# Altium PCB slpMon.PcbDoc
Units mil, origin at the board's own origin, x right, y up, seen from the top; angles counter-clockwise.
Board outline 984.25 x 669.29 mil, 2 copper layers (Top Layer, Bottom Layer), stack 65.792 mil thick; 26 components, 18 nets, 92 pads, 15 vias.
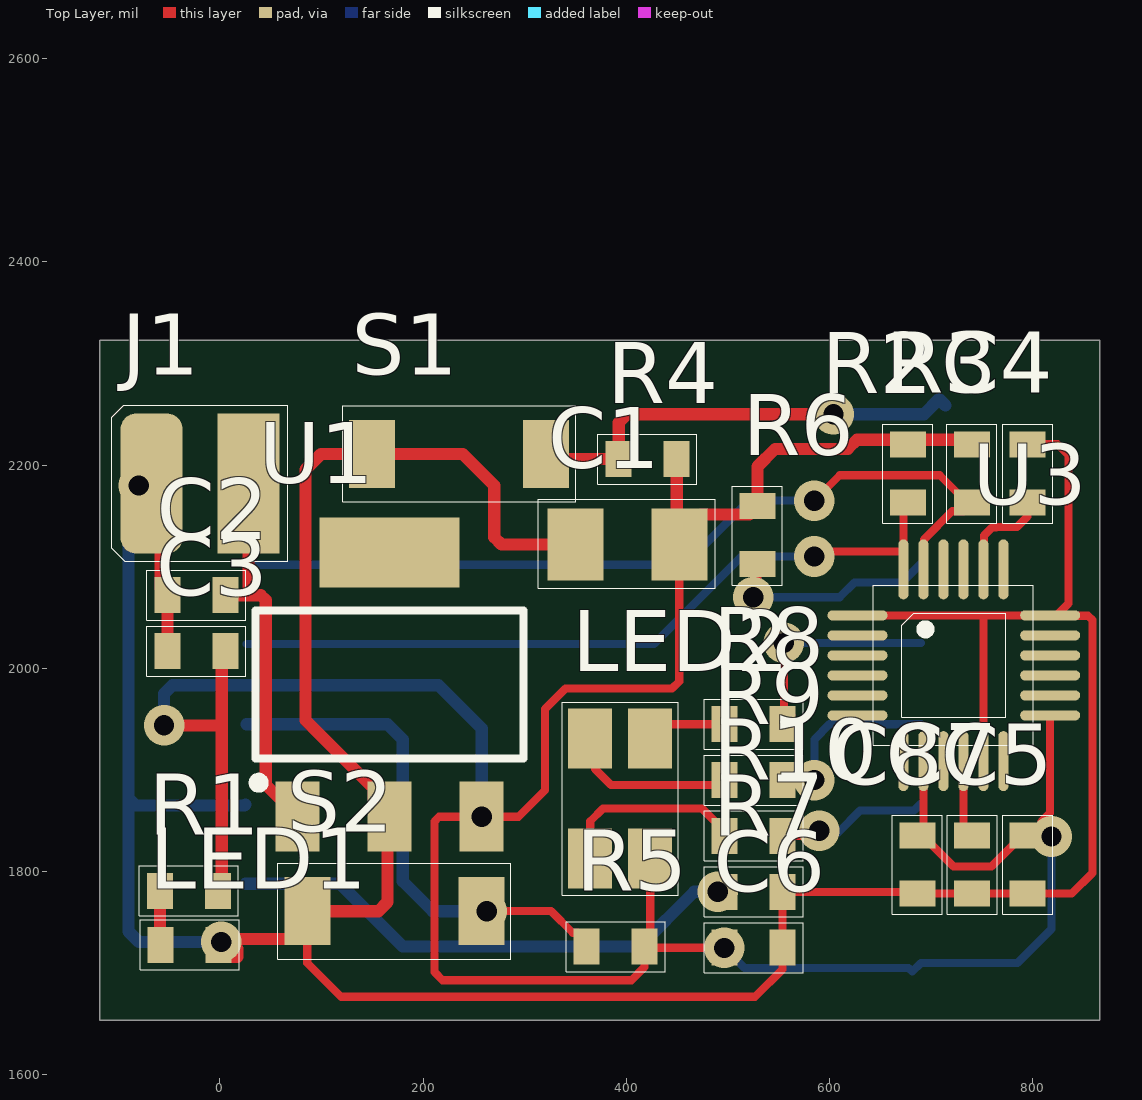
[diagram p0: Top Layer view]
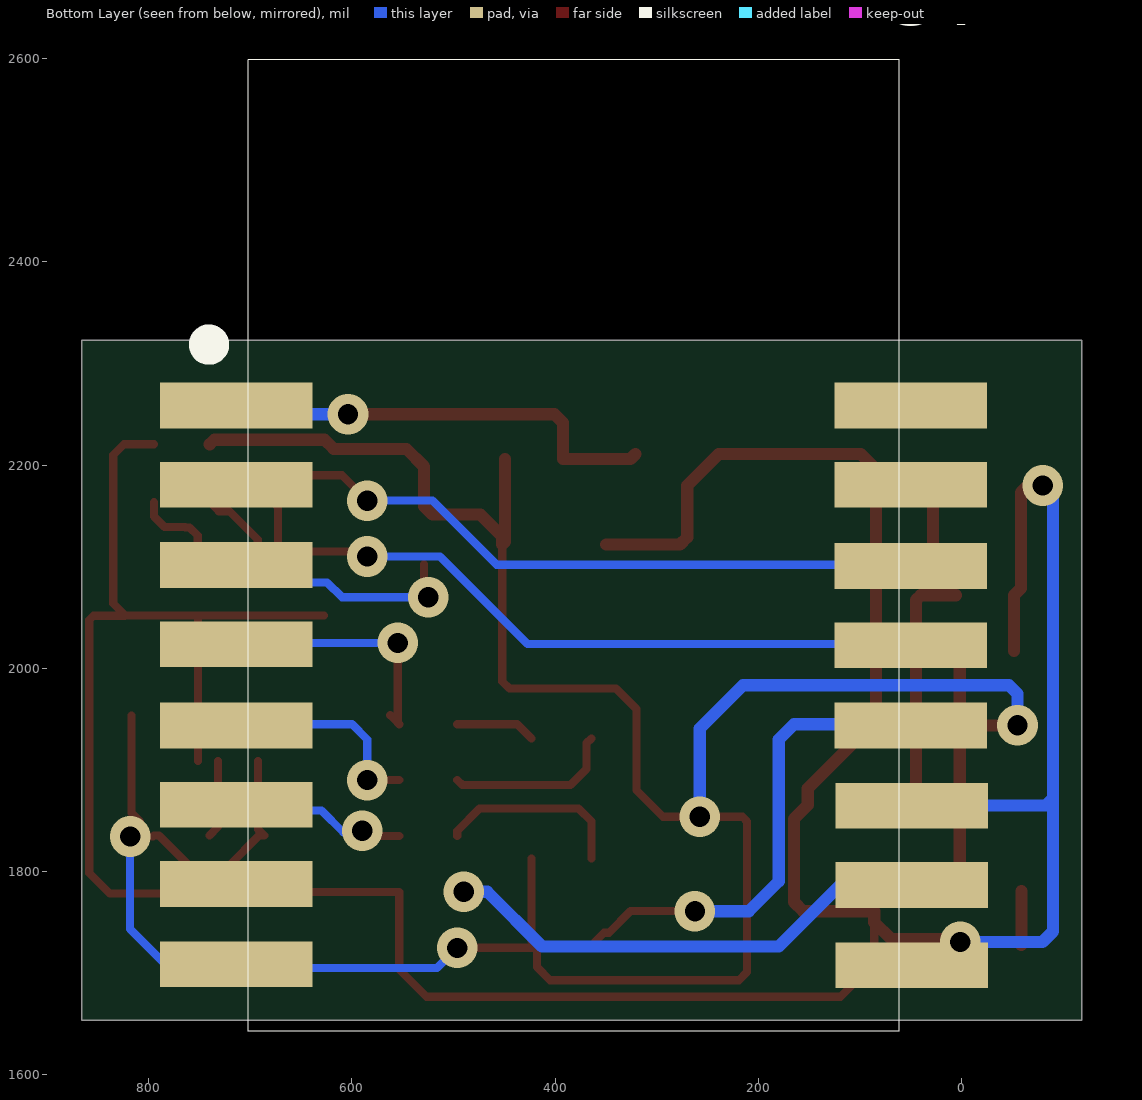
[diagram p1: Bottom Layer view, seen from below]

## Layer stack, top to bottom
Top Solder: solder mask 0.4, Solder Resist, Dk 3.5
Top Layer: signal copper 1.4
Dielectric 1: dielectric 62.9921, FR-4, Dk 4.8
Bottom Layer: signal copper 1.4
Bottom Solder: solder mask 0.4, Solder Resist, Dk 3.5

## Board outline
-118.11,2322.83 866.14,2322.83 866.14,1653.54 -118.11,1653.54

## Design rules (kind name [scope] priority, off if disabled: settings)
Clearance [All] p1: gap=8 ignorepadtopadclearanceinfootprint=TRUE except(0: Arc-Text Track-Text SMDPad-Text THPad-Text Via-Text Fill-Text Poly-Text Region-Text Text-Text)
ComponentClearance [All] p1: gap=0 collisioncheckmode=3 verticalgap=0 showdistances=FALSE
HoleSize [IsPad] p1: absolutevalues=TRUE maxlimit=100 minlimit=30 maxpercent=80.000 minpercent=20.000
MinimumSolderMaskSliver [All] p1: minsoldermaskwidth=0
PolygonConnect [All] p1: connectstyle=Relief reliefconductorwidth=10 reliefentries=4 polygonreliefangle="90 Angle" airgapwidth=10
RoutingVias [All] p1: holewidth=20 width=40 viastyle="Through Hole" minholewidth=20 minwidth=40 maxholewidth=100 maxwidth=400
SilkToSilkClearance [All] p1: silktosilkclearance=0
SilkToSolderMaskClearance [IsPad] p1: minsilkscreentomaskgap=0 clearancetoexposedcopper=TRUE
SolderMaskExpansion [All] p1: expansion=0.4
Width [All] p1: maxlimit=200 minlimit=8 preferedwidth=12 minimp=50.000000 maximp=50.000000 favimp=50.000000
25 further rules are at their usual default settings.

## Components (designator, comment, footprint, x,y, rotation, side; value= is the part's Value field where it differs from the comment)
C1 "C_POL" SMD_TANTAL_1206 399.94,2122.96 r180 top
C2 "C" SMD_RC_0603 -24.06,2070.96 r0 top
C3 "C" SMD_RC_0603 -24.06,2015.96 r0 top
C4 "223" SMD_RC_0603 795.94,2190.96 r90 top
C5 "104" SMD_RC_0603 795.94,1805.96 r90 top
C6 "C" SMD_RC_0603 525.94,1725.96 r180 top
C7 "104" SMD_RC_0603 741.33,1805.94 r90 top
C8 "103" SMD_RC_0603 687.41,1805.94 r90 top
J1 "PAD_2512x2" PAD_2512X2 -19.06,2180.96 r180 top
LED1 "LED" SMD_LED_0603 -31.15,1726.92 r0 top
LED2 "LED_RGB_3528" SMD_LED_RGB_3528 395.94,1870.96 r270 top
R1 "1K" SMD_RC_0603 -31.5,1779.98 r0 top
R2 "1K" SMD_RC_0603 677.97,2190.56 r90 top
R3 "1K" SMD_RC_0603 740.94,2190.96 r90 top
R4 "1K" SMD_RC_0603 420,2205 r0 top
R5 "1K" SMD_RC_0603 390.46,1726.95 r180 top
R6 "1K" SMD_RC_0603 530,2130 r90 top
R7 "1K" SMD_RC_0603 525.94,1780.96 r180 top
R8 "1K" SMD_RC_0603 525.94,1945.96 r180 top
R9 "1K" SMD_RC_0603 525.94,1890.96 r180 top
R10 "1K" SMD_RC_0603 525.94,1835.96 r180 top
S1 "SW" SW_SMD_1 235.94,2210.96 r0 top
S2 "SW" SW_SMD_1 170.94,1760.96 r180 top
U1 "LDO_1117" SOT-223 175.94,1975.96 r0 top
U3 "MPU6050" QUAD_24_EXTENDED 720.94,2000.96 r0 top
U? "ESP8266_12E" ESP8266_ESP12E_SIMPLER 750.57,2210.35 r180 bottom

## Footprints (in the part's own frame and the unit in brackets; to place one, negate y for a bottom-side part, rotate by r counter-clockwise, add the part's x,y. Pads: shape width x height; smd on the part's side, far side on the other; paste and mask are expansions set on the pad)
ESP8266_ESP12E_SIMPLER [mil]
  rect 150x45 smd: 1(36.47,48.38) 2(36.47,-29.62) 3(36.47,-108.62) 4(36.47,-186.62) 5(36.47,-266.62) 6(36.47,-344.62) 7(36.47,-422.62) 8(36.47,-501.62) 15(701.35,-502.63) 16(701.35,-423.63) 17(701.35,-345.63) 18(700.35,-266.63) 19(700.35,-187.63) 20(700.35,-109.63) 21(700.35,-29.63) 22(700.35,48.37)
  silkscreen extent 0,-568 689,389, body extent 53,-561 683,384, height 86
PAD_2512X2 [mm]
  rect 1.55x3.5 smd: 1(-1.2,-0.025)
  rrect50% 1.55x3.5 smd: 2(1.225,-0.025)
  silkscreen extent -2.17,-1.97 2.22,1.92
QUAD_24_EXTENDED [mm]
  oval 1.5x0.254 smd: 1(-2.375,1.3) 2(-2.375,0.8) 3(-2.375,0.3) 4(-2.375,-0.2) 5(-2.375,-0.7) 6(-2.375,-1.2) 13(2.443,-1.2) 14(2.443,-0.7) 15(2.443,-0.2) 16(2.443,0.3) 17(2.443,0.8) 18(2.443,1.3)
  oval 0.254x1.5 smd: 7(-1.225,-2.345) 8(-0.725,-2.345) 9(-0.225,-2.345) 10(0.275,-2.345) 11(0.775,-2.345) 12(1.275,-2.345) 19(1.275,2.45) 20(0.775,2.45) 21(0.275,2.45) 22(-0.225,2.45) 23(-0.725,2.45) 24(-1.225,2.45)
  silkscreen extent -1.98,-1.95 2.02,2.05, body extent -1.97,-1.95 2.02,2.05, height 0.8
SMD_LED_0603 [mm]
  rect 0.65x0.9 smd: 1(-0.7,0.025) 2(0.75,0.025)
  silkscreen extent -1.2,-0.6 1.28,0.65
SMD_LED_RGB_3528 [mm]
  rect 1.5x1.1 smd: 1(-1.525,0.7) 2(1.475,0.7) 3(1.475,-0.8) 4(-1.525,-0.8)
  silkscreen extent -2.42,-1.5 2.4,1.4
SMD_RC_0603 [mm]
  rect 0.65x0.9 smd: 1(-0.7,0.025) 2(0.75,0.025)
  silkscreen extent -1.22,-0.6 1.26,0.65
SMD_TANTAL_1206 [mm]
  rect 1.4x1.8 smd: 1(-1.325,0.025) 2(1.275,0.025)
  silkscreen extent -2.22,-1.1 2.2,1.12
SOT-223 [mm]
  rect 1.1x1.75 smd: 1(-2.525,-3.1) 2(-0.225,-3.1) 3(2.075,-3.1)
  rect 3.5x1.75 smd: 4(-0.225,3.5)
  silkscreen extent -3.62,-2.37 3.13,2.05, body extent -3.57,-3.5 3.13,3.7, height 1.85
SW_SMD_1 [mm]
  rect 1.15x1.7 smd: 1(-2.191,0) 2(2.159,0)
  silkscreen extent -2.93,-1.2 2.9,1.2

## Part data
C4 C5 C7 C8: library part C
R1 R2 R3 R4 R5 R6 R7 R8 R9 R10: library part R
U?: library part ESP8266_ESP12E_SIMPLER
LED2: ComponentLink1Description="LED 3528 - TGIC", ComponentLink1URL=https://thegioiic.com/products/led-rgb-3528
S1 S2: ComponentLink1Description=TheGioiIC, ComponentLink1URL=https://thegioiic.com/products/nut-nhan-3x4-cao-2-5mm-2pin-smd

## Via types
v1: diameter 40, hole 20, Top Layer to Bottom Layer, 15 vias

## Nets (pads, with @x,y where several pads share a name; then routed paths per layer and width w, separated by ;. In a path a pad name is that pad's centre, name@x,y a point inside that pad or via, vN(x,y) a via of type N, cw(c..) or ccw(c..) an arc to the next point about the centre after c; other vN are vias at no path point)
3V3: C1.1 C3.2 C5.2 C6.2 C8.2 LED2.2 R1.2 R2.2 R3.2 R4.2 R5.1 R6.2 U1.3 U3.8 U3.13 U?.8 | length 3005.8
  Top Layer w8: LED2.2 423.5,1731.44 R5.1 ; C1.1 452.1,1987.1 445,1980 340,1980 320,1960 320,1880 293.92,1853.92 v1(257.63,1853.92) 215.77,1853.92 211.08,1849.23 211.08,1701.08 219.14,1693.02 405.21,1693.02 418.02,1705.84 R5.1 ; v1(496.41,1724.8) C6.2 419.01,1724.98 R5.1 ; U3.8 692.39,1841.44 C8.2 691.34,1835.46 721.81,1805 759.54,1805 790.03,1835.49 C5.2 795.96,1834.49 v1(818.38,1834.49) ; v1@808.67,1849.21 817.12,1857.66 U3.13
  Top Layer w12: v1(-55,1943.81) 1.74,1943.81 ; R1.2 1.74,1784.69 1.74,1943.81 ; C3.2 1.74,2013.23 1.74,1943.81 ; R4.2 449.53,2124.56 C1.1 452.1,2129.85 473.66,2151.41 520.9,2151.41 R6.2 529.02,2198.52 546.49,2216 618.01,2216 627.01,2225 735.44,2225 R3.2
  Bottom Layer w8: v1(496.41,1724.8) 516.21,1705 677.82,1705 681.41,1701.41 690,1710 785,1710 818.38,1743.38 v1(818.38,1834.49)
  Bottom Layer w12: v1(-55,1943.81) -55,1975 -46.72,1983.28 215.12,1983.28 257.63,1940.77 v1(257.63,1853.92)
B: R10.1 U?.6 | length 151.7
  Top Layer w8: R10.1 584.98,1834.98 v1(590,1840)
  Bottom Layer w8: v1(590,1840) 590,1838.66 608.66,1838.66 630,1860 683,1860 U?.6@690,1867
G: R9.1 U?.5 | length 182.7
  Top Layer w8: R9.1 v1(585,1890)
  Bottom Layer w8: v1(585,1890) 585,1930 600,1945 U?.5@690,1945
GND: C1.2 C2.1 C3.1 C4.2 C5.1 C6.1 C7.1 C8.1 J1.2 LED1.2 R7.1 S1.1 S2.2 U1.2 U3.1 U3.11 U3.18 U?.15 U?.17 | length 3639.3
  Top Layer w8: S2.2@85.94,1750.14 85.94,1710.12 119.32,1676.73 526.73,1676.73 553.5,1703.5 C6.1 R7.1 684.82,1779.98 C8.1 C7.1 ; U3.1 751.82,2052.15 ; C7.1@740.37,1778.41 C5.1 838.41,1778.41 858.65,1798.65 858.65,2047.46 854.34,2051.76 823.74,2051.76 U3.18@823.35,2052.15 ; U3.11 751.45,2051.78 751.82,2052.15 ; C4.2 824.51,2220.49 835,2210 835,2063.79 U3.18@823.35,2052.15 ; 751.82,2052.15 U3.18 U3.18@823.35,2052.15
  Top Layer w12: v1(-80,2180) -69.24,2180 J1.2 -58.42,2173.07 -58.42,2078.74 C2.1 C3.1 ; C1.2 277.03,2121.98 270,2129.01 270,2180 239.04,2210.96 S1.1 99.34,2210.96 84.18,2195.8 84.18,1948.9 151.43,1881.66 151.43,1865.41 165,1851.84 165,1770 155.96,1760.96 S2.2 85.94,1750.14 69.3,1733.5 3.97,1733.5 v1(1.17,1730.7) ; v1(1.17,1730.7) LED1.2 -1.62,1722.99 5.17,1716.19 17.17,1716.19 17.17,1724.07 10.54,1730.7 v1(1.17,1730.7)
  Bottom Layer w12: v1(-80,2180) -90,2170 -90,1871.92 ; v1(1.17,1730.7) -79.74,1730.7 -90,1740.96 -90,1871.92 ; U?.17@25.12,1865.99 24.2,1865.06 -83.15,1865.06 -90,1871.92
NetC2_2: C2.2 J1.1 U1.1 | length 379
  Top Layer w12: C2.2 25.38,2071.95 ; J1.1 28.18,2074.75 25.38,2071.95 ; U1.1 45,1885.45 45,2067.14 40.19,2071.95 25.38,2071.95
NetC4_1: C4.1 U3.20 | length 98.3
  Top Layer w8: U3.20 751.83,2097.8 751.83,2130.55 759.89,2138.61 763.75,2138.61 764.09,2138.95 784.63,2138.95 794.95,2149.27 C4.1
NetC7_2: C7.2 U3.10 | length 76.7
  Top Layer w8: U3.10 731.76,1844.04 C7.2
NetLED1_1: LED1.1 R1.1 | length 53.2
  Top Layer w12: R1.1 -58.89,1780.79 -58.89,1728.08 LED1.1
NetLED2_1: LED2.1 R8.2 | length 78.7
  Top Layer w8: LED2.1 437.49,1945 R8.2
NetLED2_3: LED2.3 R10.2 | length 187.7
  Top Layer w8: LED2.3 364.44,1849.44 376.9,1861.9 474.41,1861.9 496.41,1839.9 R10.2
NetLED2_4: LED2.4 R9.2 | length 168
  Top Layer w8: LED2.4 369.13,1926.32 369.13,1900.87 385,1885 491.43,1885 R9.2
NetR4_1: R4.1 S1.2 U?.1 | length 443.2
  Top Layer w12: S1.2 325.92,2205.98 R4.1 392.44,2241.7 400.74,2250 v1(603.93,2250)
  Bottom Layer w12: v1(603.93,2250) 692.83,2250 707.83,2265 U?.1
NetR5_2: R5.2 S2.1 U?.18 | length 510.2
  Top Layer w8: v1(262.48,1760.96) 325.94,1760.96 347.22,1739.68 352.14,1739.68 360.94,1730.89 R5.2
  Bottom Layer w12: U?.18@26.12,1944.99 165.01,1944.99 180,1930 180,1790.43 209.46,1760.96 v1(262.48,1760.96)
NetR6_1: R6.1 U?.3 | length 212.8
  Top Layer w8: v1(525,2070) 529.02,2074.02 R6.1
  Bottom Layer w8: v1(525,2070) 610,2070 624.5,2084.5 671.5,2084.5 U?.3@690,2103
NetR7_2: R7.2 U?.16 | length 512.8
  Bottom Layer w12: U?.16@25.12,1787.99 118.12,1787.99 180,1726.11 412.9,1726.11 466.79,1780 v1(490,1780)
R: R8.1 U?.4 | length 228.1
  Top Layer w8: v1(555,2025) 555,1946.48 R8.1 R8.1@562.29,1953.78
  Bottom Layer w8: v1(555,2025) U?.4@690,2025
SCL: R3.1 U3.23 U?.20 | length 853.1
  Top Layer w8: v1(585,2165) 610,2190 708.44,2190 730.08,2168.36 735,2168.36 R3.1 731.16,2154.61 720.7,2154.61 692.78,2126.69 692.78,2097.8 U3.23
  Bottom Layer w8: U?.20@26.12,2101.99 457.69,2101.99 520.7,2165 v1(585,2165)
SDA: R2.1 U3.24 U?.19 | length 752
  Top Layer w8: v1(585,2110) 590,2115 671.78,2115 U3.24@672.71,2114.08 ; U3.24 U3.24@672.71,2114.08 ; R2.1 672.71,2158.72 U3.24@672.71,2114.08
  Bottom Layer w8: U?.19@26.12,2023.99 427.28,2023.99 513.29,2110 v1(585,2110)
pads on no net: U1.4 U3.2 U3.3 U3.4 U3.5 U3.6 U3.7 U3.9 U3.12 U3.14 U3.15 U3.16 U3.17 U3.19 U3.21 U3.22 U?.2 U?.7 U?.21 U?.22

## Text inside footprints (layer, text, board x,y; h text height)
U?: Mechanical 13 "CUTOUT POLYGON" at 689.45,2553.32 h10; Mechanical 13 "ANTENNA AREA" at 689.45,2573.32 h10